# EAGLE board driver LF (tugas nanang) (EAGLE 7.5.0)
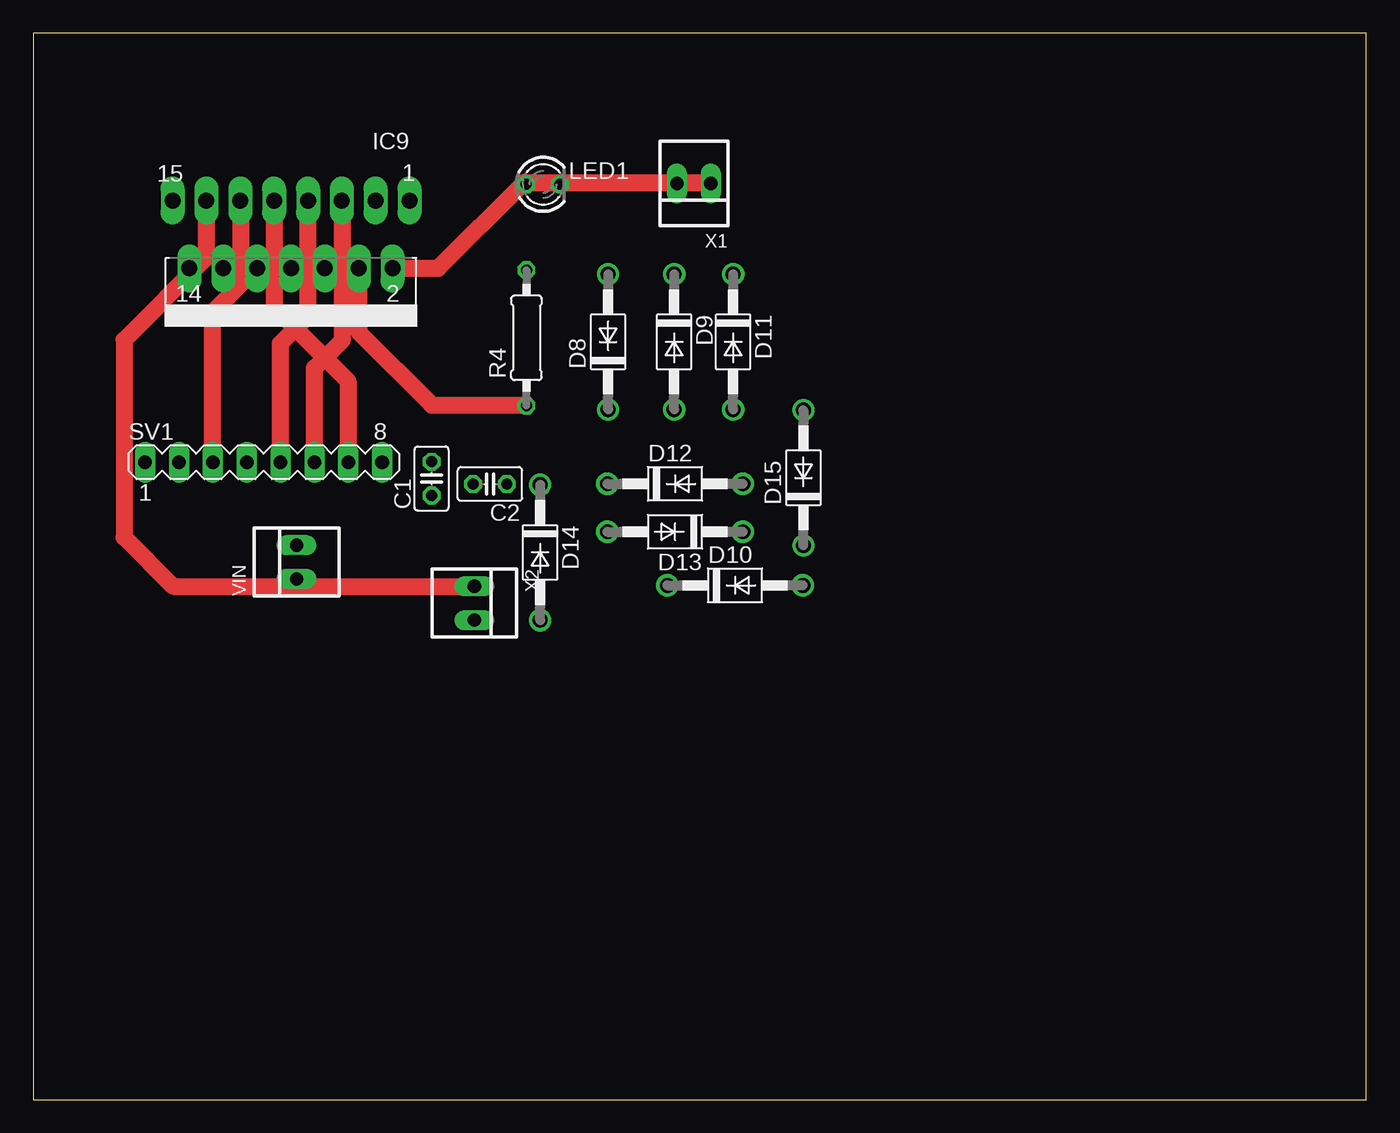
[diagram p0: board, top side]
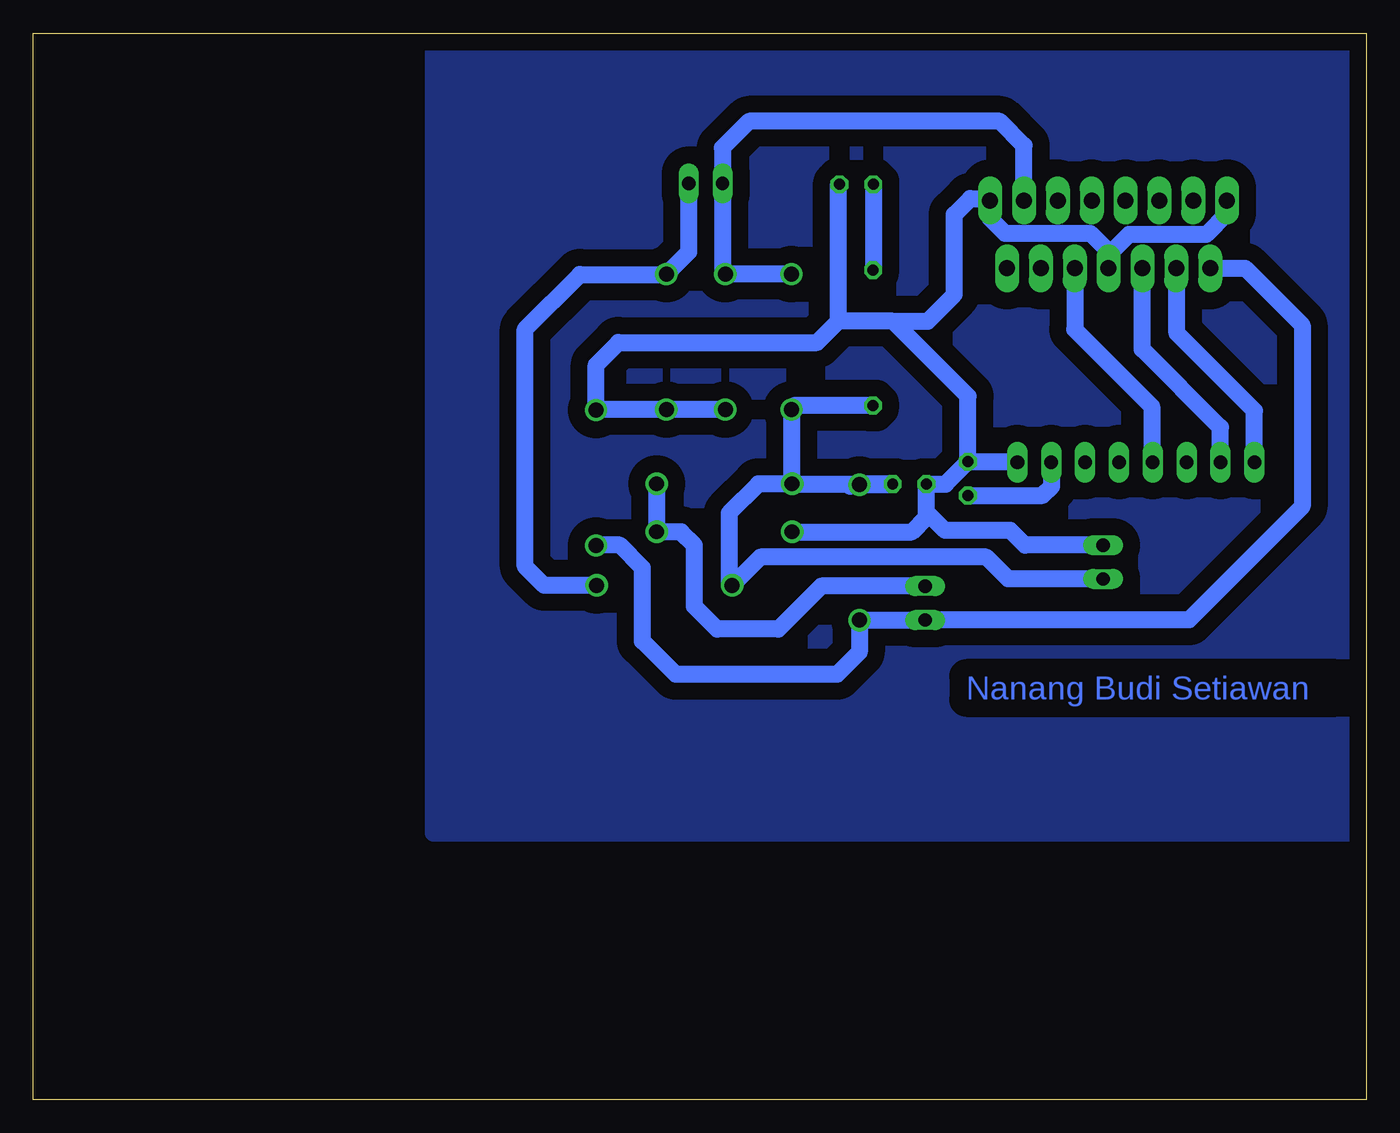
[diagram p1: board, bottom side, seen from below]

Size 100 x 80 mm. Coordinates in mm from the lower left corner, seen from the top.
Outline: 0,0 100,0 100,80 0,80 0,0
Copper layers (1*16): Top 0.035mm / dielectric 1.5mm / Bottom 0.035mm
Design rules "default": minimum track width 10mil, minimum drill 24mil, track to track 8mil, track to pad 8mil, pad to pad 8mil, via to via 8mil, smd to smd 8mil, copper to edge 40mil, drill to drill 8mil, minimum pad ring 10mil, minimum via ring 8mil, stop-mask expansion 4mil, vias tented up to drill 0mil, thermal gap 10mil

## Footprints (pad centres in the part's own frame; a part is rotated, then mirrored left to right if it is on the bottom)
C025-025X050 = drill 0.813 octagon: 1 -1.27,0; 2 1.27,0
DO41-10 = drill 1.118: A 5.08,0; C -5.08,0
MULTIWATT-15 = drill 1.2 long: 1 -8.89,-7.62; 2 -7.62,-2.54; 3 -6.35,-7.62; 4 -5.08,-2.54; 5 -3.81,-7.62; 6 -2.54,-2.54; 7 -1.27,-7.62; 8 0,-2.54; 9 1.27,-7.62; 10 2.54,-2.54; 11 3.81,-7.62; 12 5.08,-2.54; 13 6.35,-7.62; 14 7.62,-2.54; 15 8.89,-7.62
LED3MM = drill 0.813 octagon: A -1.27,0; K 1.27,0
0207/10 = drill 0.813 octagon: 1 -5.08,0; 2 5.08,0
MA08-1 = drill 1.016 long: 1 -8.89,0; 2 -6.35,0; 3 -3.81,0; 4 -1.27,0; 5 1.27,0; 6 3.81,0; 7 6.35,0; 8 8.89,0
22-23-2021 = drill 1 long: 1 -1.27,0; 2 1.27,0

## Placement (x,y rotation side)
C1  100nF  [C025-025X050]  29.88,46.59 90 top
C2  100nF  [C025-025X050]  34.26,46.18 180 top
D8  1N4004  [DO41-10]  43.12,56.85 90 top
D9  1N4004  [DO41-10]  48.08,56.85 270 top
D10  1N4004  [DO41-10]  52.65,38.58 0 top
D11  1N4004  [DO41-10]  52.5,56.85 270 top
D12  1N4004  [DO41-10]  48.15,46.2 0 top
D13  1N4004  [DO41-10]  48.15,42.6 180 top
D14  1N4004  [DO41-10]  38.02,41.05 270 top
D15  1N4004  [DO41-10]  57.78,46.65 90 top
IC9  L298  [MULTIWATT-15]  19.33,59.83 180 top
LED1  [LED3MM]  38.25,68.67 0 top
R4  330  [0207/10]  37,57.15 90 top
SV1  [MA08-1]  17.28,47.82 0 top
VIN  22-23-2021  [22-23-2021]  19.75,40.33 90 top
X1  22-23-2021  [22-23-2021]  49.56,68.75 180 top
X2  22-23-2021  [22-23-2021]  33.09,37.25 270 top

## Library data of the parts
C1 C2 R4 = rcl
D8-D15 = diode
IC9 = st-microelectronics
LED1 = led
SV1 = con-lstb; OC_FARNELL: unknown; OC_NEWARK: unknown
VIN X1 X2 = con-molex; MF: MOLEX; MPN: 22-23-2021; OC_FARNELL: 1462926; OC_NEWARK: 25C3832

## Nets
GND: C1.2 C2.2 D9.A D11.A D13.A D15.A IC9.1 IC9.8 IC9.15 LED1.K SV1.8 VIN.2
N$1: IC9.5 SV1.6
N$3: IC9.7 SV1.5
N$5: IC9.12 SV1.1
N$8: IC9.10 SV1.2
N$16: IC9.6 SV1.4
N$17: IC9.11 SV1.3
N$44: LED1.A R4.2
N$204: D8.A D9.C IC9.3 X1.2
N$205: D10.A D11.C IC9.2 X1.1
N$206: D12.A D13.C IC9.13 X2.1
N$207: D14.A D15.C IC9.14 X2.2
VCC: C1.1 IC9.9 SV1.7
VDD: C2.1 D8.C D10.C D12.C D14.C IC9.4 R4.1 VIN.1

## Tracks (layer width: path | path; a pad name or v marks a point on that pad's centre or on a via)
GND
  Bottom 1.27: D9.A D11.A 57.78,51.77 D15.A 57.78,55.12 56.1,56.8 41.2,56.8 39.6,58.4 | C1.2 31.56,46.18 C2.2 33,44.1 | 39.6,58.4 39.6,68.59 LED1.K | C1.2 29.88,52.78 35.5,58.4 | 35.5,58.4 39.6,58.4 | D13.A 34.1,42.6 33,43.7 33,44.1 | SV1.8 29.84,47.82 C1.2 | VIN.2 25.6,41.6 26.7,42.7 31.6,42.7 33,44.1 | IC9.15 10.44,66.46 12,64.9 17.8,64.9 19.2,63.5 | 19.2,63.5 19.2,62.5 IC9.8 | 19.2,63.5 20.7,65 27.1,65 28.22,66.12 IC9.1 28.37,67.6 29.7,67.6 30.9,66.4 30.9,60.4 32.9,58.4 35.5,58.4
N$1
  Top 1.27: SV1.6 21.09,54.89 23.2,57 23.2,67.39 IC9.5
N$2
  pour Bottom (isolate 1.27): 0,80 70,80 70,20 0,20
N$3
  Top 1.27: SV1.5 18.55,56.75 20.6,58.8 IC9.7
N$5
  Bottom 1.27: SV1.1 8.39,51.69 14.2,57.5 14.2,62.32 IC9.12
N$8
  Bottom 1.27: SV1.2 10.93,50.43 16.8,56.3 IC9.10
N$16
  Bottom 1.27: IC9.6 21.87,57.77 16.1,52 16.1,47.91 SV1.4
N$17
  Top 1.27: SV1.3 13.47,59.07 15.6,61.2 15.6,67.37 IC9.11
N$44
  Bottom 1.27: LED1.A 36.98,62.25 R4.2
N$204
  Bottom 1.27: D8.A D9.C 48.29,62.14 X1.2 48.3,71.4 46.3,73.4 27.5,73.4 25.68,71.58 IC9.3
N$205
  Top 1.27: IC9.2 30.37,62.37 36.8,68.8 50.78,68.8 X1.1
  Bottom 1.27: D10.A 61.68,38.58 63.1,40 63.1,57.8 59,61.9 52.53,61.9 D11.C 50.83,63.6 X1.1
N$206
  Top 1.27: IC9.13 12.98,63.18 6.8,57 6.8,42.2 10.5,38.5 33.07,38.5 X2.1
  Bottom 1.27: D12.A D13.C 51.4,42.6 50.4,41.6 50.4,37 48.7,35.3 44.1,35.3 40.88,38.52 X2.1
N$207
  Bottom 1.27: D15.C 57.75,41.6 56,41.6 54.3,39.9 54.3,34.4 51.8,31.9 39.7,31.9 38.02,33.58 D14.A X2.2 33.07,36 13.3,36 4.8,44.5 4.8,58.1 9.07,62.37 IC9.14
VCC
  Top 1.27: IC9.9 18.06,59.44 23.6,53.9 23.6,47.85 SV1.7
  Bottom 1.27: C1.1 24.28,45.32 23.6,46 23.6,47.79 SV1.7
VDD
  Top 1.27: IC9.4 24.41,57.59 29.9,52.1 36.97,52.1 R4.1
  Bottom 1.27: D12.C 38.09,46.2 D14.C 35.58,46.13 C2.1 38.52,46.18 38.7,46 | D12.C 43.07,51.72 D8.C 42.82,52.07 R4.1 | VIN.1 26.86,39.06 28.5,40.7 45.45,40.7 D10.C 47.8,38.81 47.8,44 45.6,46.2 D12.C

## Text on the board
Bottom: Nanang Budi Setiawan